# Allegro board PROIECT CAD.brd
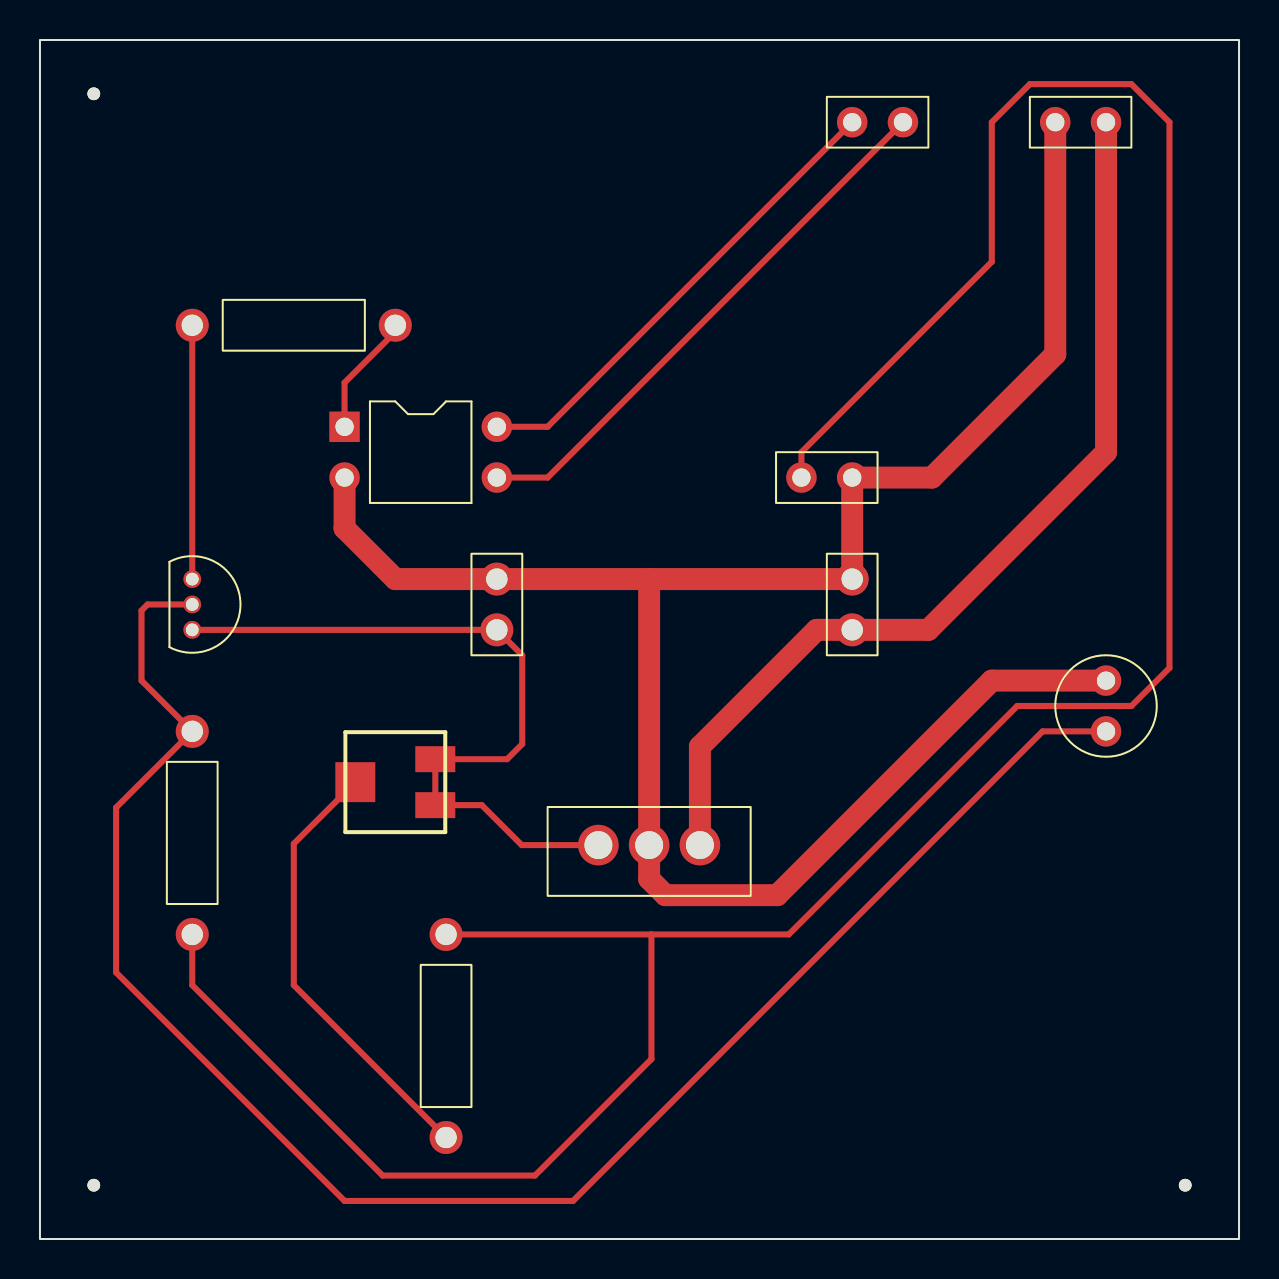
[diagram p0: board, top side]
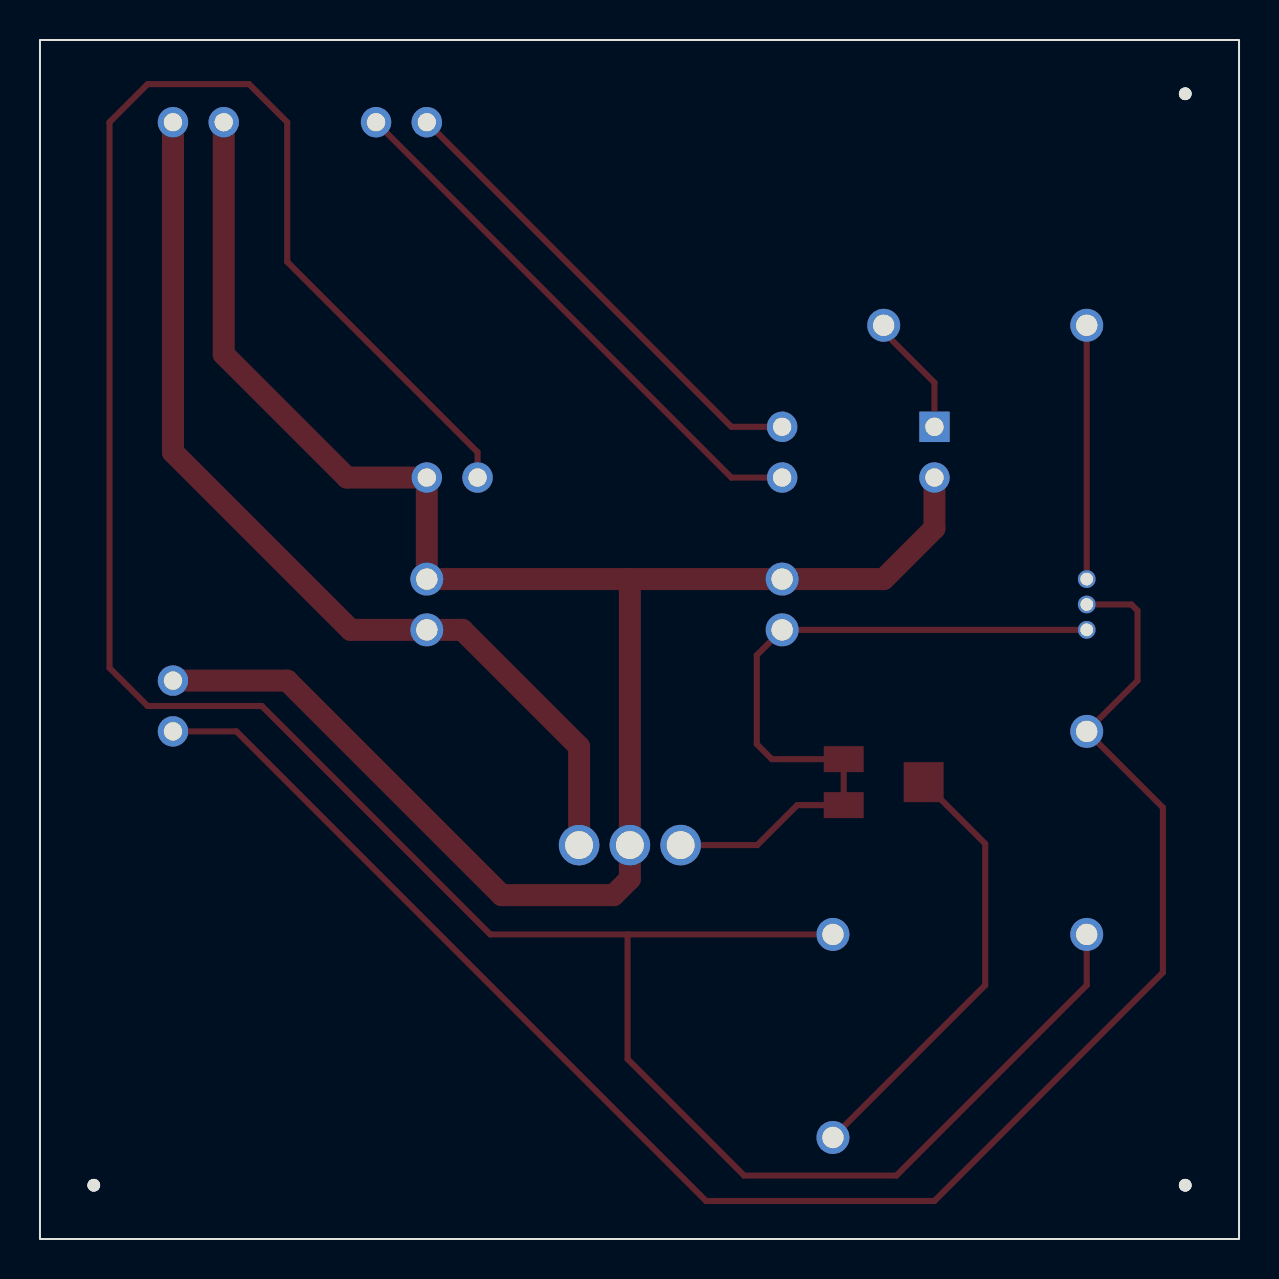
[diagram p1: board, bottom side, seen from below]

Outline 59.99 x 59.99 mm; copper layers: TOP, BOTTOM. Coordinates in mm from the lower left corner of the outline.
Outline path: rectangle 0,0 59.99,59.99

## Design rules (mm)
nets with their own width: min track width 0.305; nets N00055 N00092 N00205 N00261 N00298 N00947 N02719 N02728
nets with their own width: min track width 1.1; nets 9-18V GND

## Placement (name value [footprint] x y rotation side)
C1  1uF/16V  [CAP196]  53.34 25.4 0 top
C2  100nF  [CAPCK05]  22.86 30.48 0 top
C3  100nF  [CAPCK05]  40.64 30.48 0 top
HDP-07  SENSOR  [JUMPER2]  38.1 38.1 0 top
IC1  LM7805/TO  [TO220AB]  33.02 19.71 0 top
J1  CON2  [JUMPER2]  53.34 55.88 180 top
J2  CON2  [JUMPER2]  40.64 55.88 0 top
NOREF  -  [unnamed]  57.3 2.69 0 top
NOREF#2  -  [unnamed]  2.69 2.69 0 top
NOREF#3  -  [unnamed]  2.69 57.3 0 top
P1  220K  [TRIM_BI_23AL]  17.78 22.86 0 top
PC817/ISO1  OPTO ISOLATOR-A  [DIP4_3]  15.24 40.64 0 top
R1  1K  [RES400]  20.32 5.08 0 top
R2  100  [RES400]  7.62 15.24 0 top
R3  270  [RES400]  7.62 45.72 270 top
T1  2N2222  [TO92]  7.62 33.02 0 top

## Library data of the parts
C1 = CAPACITOR POL: Tolerance: ***; User Part Number: ***
C2 C3 = CAPACITOR: Tolerance: ***; User Part Number: ***
HDP-07 = SENSOR: User Part Number: ***
IC1 = LM7805/TO_6
J1 J2 = CON2: User Part Number: ***
P1 = POT
PC817/ISO1 = OPTO ISOLATOR-A_0: Tolerance: ***; User Part Number: ***
R1-R3 = RESISTOR: Tolerance: ***; User Part Number: ***
T1 = 2N2222

## Footprints (pads in the part's own frame, mm; a bottom-side part is the same pattern mirrored in y, then rotated)
CAP196
  round 1.524 hole 0.914: 1(0,0) 2(0,2.54)
CAPCK05
  round 1.651 hole 1.067: 1(0,0) 2(0,2.54)
DIP4_3
  rect 1.524x1.524 hole 0.914: 1(0,0)
  round 1.524 hole 0.914: 2(0,-2.54) 3(7.62,-2.54) 4(7.62,0)
JUMPER2
  round 1.524 hole 0.914: 1(0,0) 2(2.54,0)
RES400
  round 1.651 hole 1.067: 1(0,0) 2(0,10.16)
TO92
  round 0.889 hole 0.635: 1(0,0) 2(0,-1.27) 3(0,-2.54)
TO220AB
  round 2.032 hole 1.397: 1(0,0) 2(-2.54,0) 3(-5.08,0)
TRIM_BI_23AL
  rect 2x1.3 smd: 1(2,1.15) 2(2,-1.15)
  rect 2x2 smd: 3(-2,0)
unnamed
  round 0.635 hole 3.175 unplated: (0,0)

## Nets
GND: C1.2 C2.2 C3.2 HDP-07.2 IC1.2 J1.2 PC817/ISO1.2
9-18V: C3.1 IC1.1 J1.1
N00055: P1.3 R1.1
N00092: HDP-07.1 R1.2 R2.1
N00205: C1.1 R2.2 T1.2
N00261: R3.1 T1.1(EMITTER)
N00298: PC817/ISO1.1 R3.2
N00947: C2.1 IC1.3(VOUT) P1.1 P1.2(WIPER) T1.3
N02719: J2.1 PC817/ISO1.4
N02728: J2.2 PC817/ISO1.3(EMITTER)

## Routing (per net, layer and track width the routed paths; a pad name or vN(x,y) marks a point on that pad's centre or on a via; arc(x,y) is an arc through that point)
GND: length 101
  TOP w1.1: J1.2 50.8,44.27 44.63,38.1 HDP-07.2 C3.2 30.48,33.02 ; PC817/ISO1.2 15.24,35.56 17.78,33.02 C2.2 30.48,33.02 ; 30.48,33.02 IC1.2 30.48,18.02 31.29,17.21 36.89,17.21 47.62,27.94 C1.2
9-18V: length 47.9
  TOP w1.1: IC1.1 33.02,24.64 38.86,30.48 C3.1 44.45,30.48 53.34,39.37 J1.1
N00055: length 22.2
  TOP w0.305: R1.1 12.7,12.7 12.7,19.78 P1.3
N00092: length 139.3
  TOP w0.305: 30.59,15.24 37.47,15.24 48.9,26.67 54.61,26.67 56.52,28.57 56.52,55.88 54.61,57.78 49.53,57.78 47.62,55.88 47.62,48.9 38.1,39.37 HDP-07.1 ; 30.59,15.24 30.59,9 24.77,3.17 17.14,3.17 7.62,12.7 R2.1 ; 30.59,15.24 R1.2
N00205: length 87.4
  TOP w0.305: T1.2 5.38,31.75 5.08,31.45 5.08,27.94 R2.2 3.81,21.59 3.81,13.33 15.24,1.91 26.67,1.91 50.16,25.4 C1.1
N00261: length 12.7
  TOP w0.305: R3.1 T1.1
N00298: length 6.1
  TOP w0.305: PC817/ISO1.1 15.24,42.85 17.78,45.39 R3.2
N00947: length 37.4
  TOP w0.305: IC1.3 24.1,19.71 22.11,21.71 P1.2 P1.1 23.38,24.01 24.13,24.77 24.13,29.21 C2.1 T1.3
N02719: length 24.1
  TOP w0.305: J2.1 25.4,40.64 PC817/ISO1.4
N02728: length 27.7
  TOP w0.305: PC817/ISO1.3 25.4,38.1 J2.2

## Text on the board
User.Comments: 60mm | L2 : BOTTOM CONDUCTOR - COPPER 0.03MM | SURFACE - AIR 0MM | L1 : TOP CONDUCTOR - COPPER 0,03MM | DESIGN CROSS SECTION CHART | - - - - - - - - - - - - - | TOTAL THICKNESS 0.26 MM | DIELECTRIC - FR-4 0.2MM
COMPVAL_TYPE_TOP: FIGURE | FINISHED_SIZE | 25.0 | 36.0 | 42.0 | 55.0 | 125.0 | DRILL CHART: TOP to BOTTOM | ALL UNITS ARE IN MILS | PLATED | NON-PLATED | QTY | 3 | 12 | 10
